# Altium PCB 主板-霍尔BC接地.PcbDoc (part 3 of 6)
Units mm, origin at the board's own origin, x right, y up, seen from the top; angles counter-clockwise.
Board outline 97.69 x 103.45 mm, 2 copper layers (Top Layer, Bottom Layer); 83 components, 83 nets, 266 pads, 295 vias.
Unrouted connection lines stored in the file: 11.
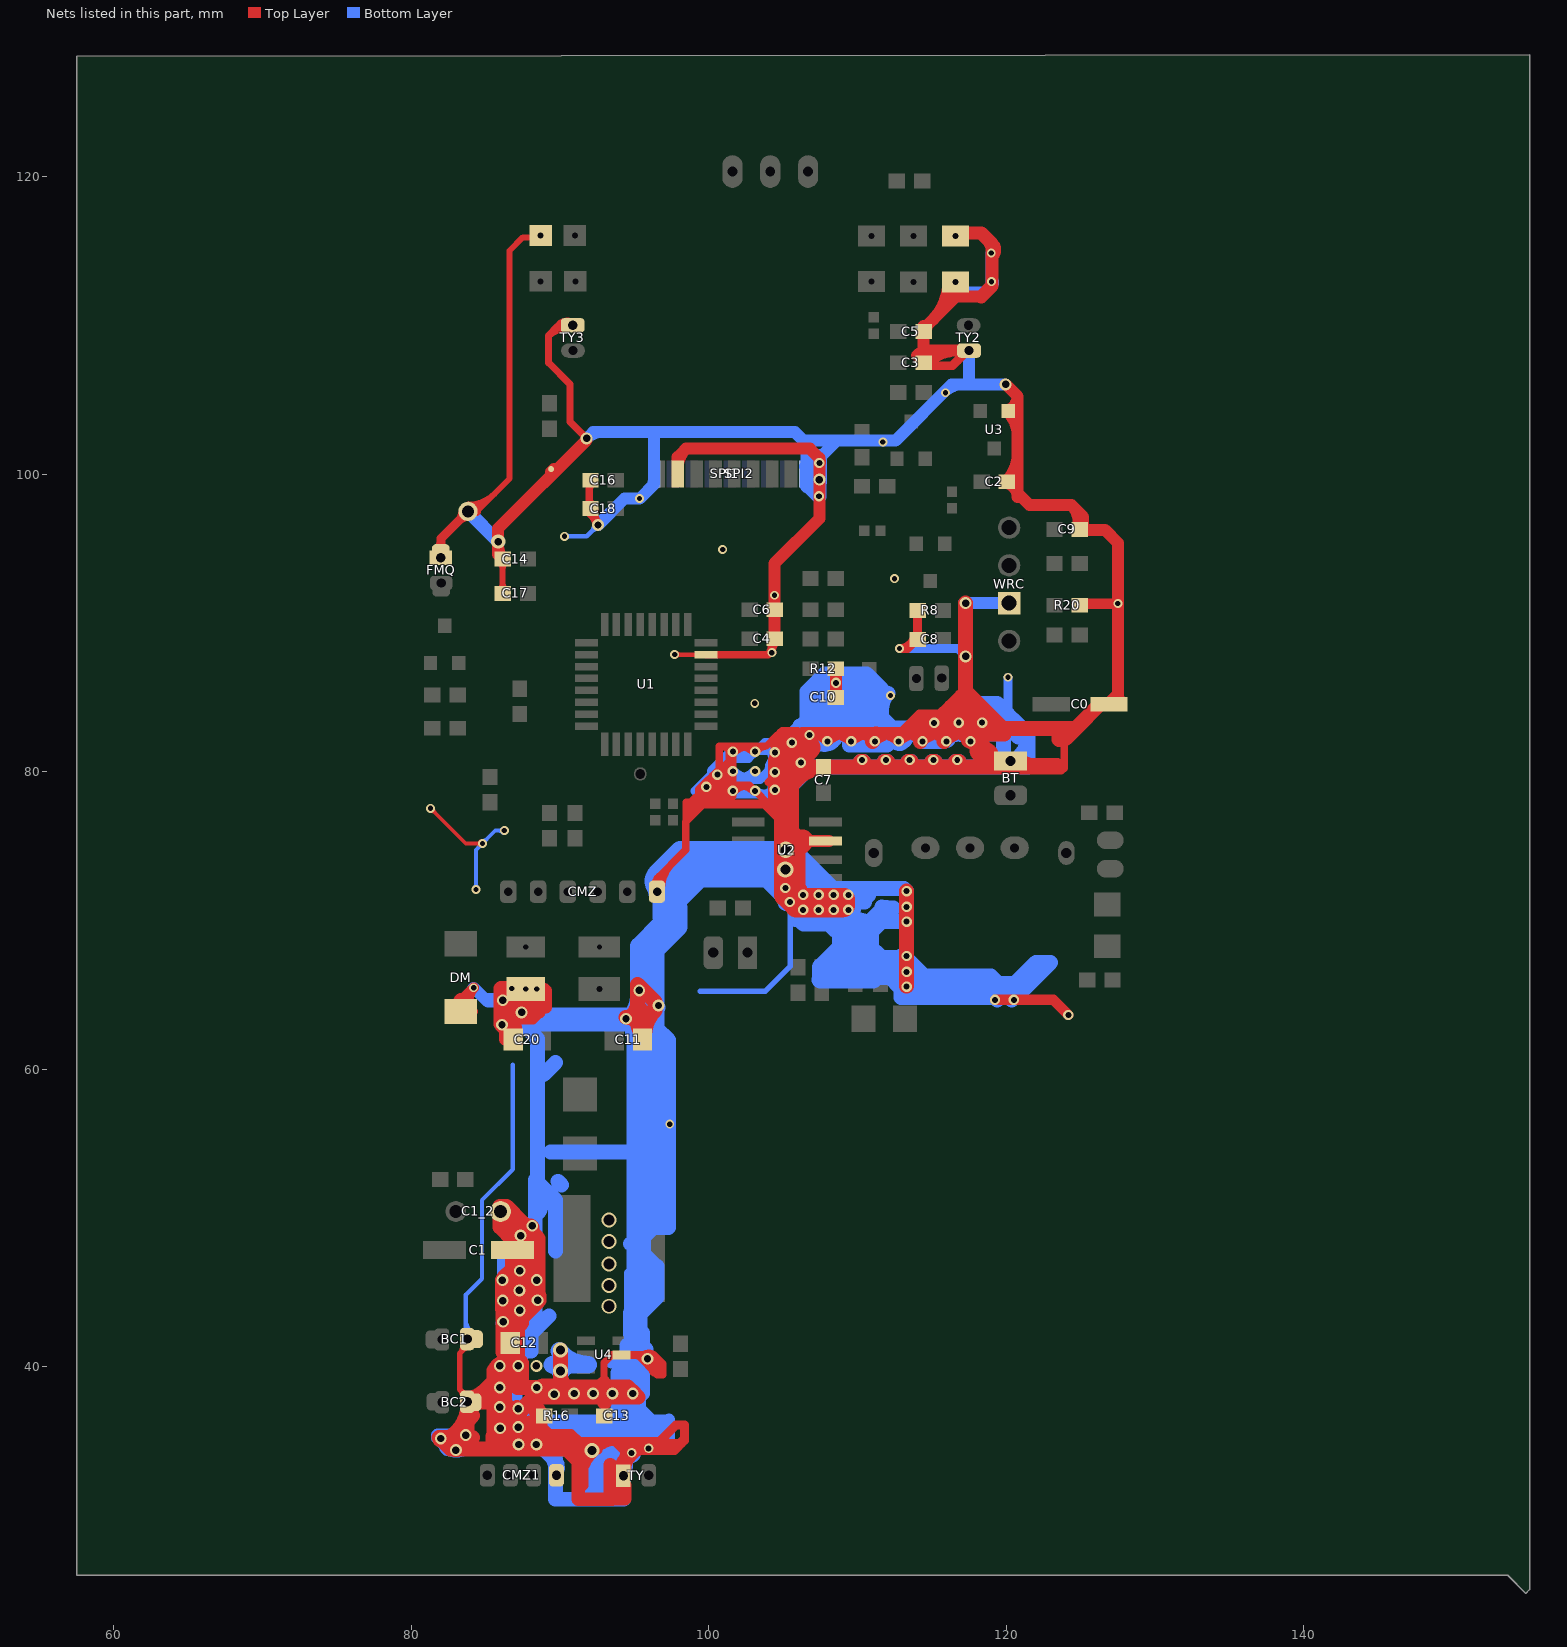
[diagram p3: the nets of this part, all layers, seen from the top]

## Via types
v1: diameter 0.6, hole 0.35, Top Layer to Bottom Layer, 117 vias
v2: diameter 0.7, hole 0.4, Top Layer to Bottom Layer, 104 vias
v3: diameter 0.8, hole 0.5, Top Layer to Bottom Layer, tented both sides, 32 vias
v4: diameter 0.8, hole 0.5, Top Layer to Bottom Layer, 15 vias
v5: diameter 1, hole 0.6, Top Layer to Bottom Layer, tented both sides, 5 vias
v6: diameter 1, hole 0.75, Top Layer to Bottom Layer, tented both sides, 5 vias
v7: diameter 3.4, hole 2.9, Top Layer to Bottom Layer, 4 vias
v8: diameter 0.65, hole 0.4, Top Layer to Bottom Layer, tented both sides, 2 vias
v9: diameter 0.8, hole 0.35, Top Layer to Bottom Layer, 2 vias
v10: diameter 0.7, hole 0.35, Top Layer to Bottom Layer, 2 vias
v11: diameter 1.1, hole 0.68, Top Layer to Bottom Layer, 2 vias
v12: diameter 0.62, hole 0.4, Top Layer to Bottom Layer, 1 vias
v13: diameter 0.95, hole 0.5, Top Layer to Bottom Layer, 1 vias
v14: diameter 0.9, hole 0.5, Top Layer to Bottom Layer, tented both sides, 1 vias
v15: diameter 0.7, hole 0.4, Top Layer to Bottom Layer, tented bottom, 1 vias
v16: diameter 0.8, hole 0.5, Top Layer to Bottom Layer, tented bottom, 1 vias

## Nets (pads, with @x,y where several pads share a name; then routed paths per layer and width w, separated by ;. In a path a pad name is that pad's centre, name@x,y a point inside that pad or via, vN(x,y) a via of type N, cw(c..) or ccw(c..) an arc to the next point about the centre after c; other vN are vias at no path point) (continued)
GND: BC1.1 BC2.1 BT.2 C0.2 C1.1 C1_2.1 C2.1 C3.1 C4.2 C5.1 C6.1 C7.1 C8.1 C9.1 C10.2 C11.2 C12.2 C13.2 C14.2 C16.1 C17.2 C18.1 C20.1 CMZ1.7 CMZ.2 DM.1 FMQ.1 pad.0@81.991,94.717 pad.0@84.125,37.617 pad.0@84.226,41.859 pad.0@87.7,65.4 pad.0@88.7,116.053 pad.0@89.408,100.355 pad.0@96.33,100.032 pad.0@116.6,112.932 pad.0@116.6,116.032 pad.4@83.82,97.511 R8.2 R12.1 R16.2 R20.1 SPI1.7 SPI2.8 TY2.2 TY3.2 TY.2 U1.7 U2.3 U3.1 U4.2 WRC.2 | length 2552.9
  Top Layer w0.254: v1@81.305,77.373 cw(c81.305,76.956) 81.601,77.251 cw(c81.896,77.546) v1@81.478,77.546 ; v1(81.305,77.546) 83.668,75.184 v1(84.785,75.184) ; v3@83.52,35.639 ccw(c82.842,36.728) 84.125,36.728 ; v3@83.654,35.424 ccw(c83.127,36.271) 84.125,36.271 ; BC2.1@83.752,37.02 cw(c83.739,36.634) 84.125,36.634 ; pad.0@83.761,37.274 cw(c83.748,36.897) 84.125,36.897 ; v3@83.788,35.208 ccw(c83.411,35.814) 84.125,35.814 ; pad.0@83.861,37.225 cw(c83.526,36.728) 84.125,36.728 ; 84.125,35.255 84.125,36.728 ; pad.0@84.125,37.617 84.125,36.728 ; pad.0@84.389,37.225 ccw(c84.724,36.728) 84.125,36.728 ; v1@84.663,75.062 ccw(c84.368,74.766) 84.368,75.184 ccw(c84.368,75.602) v1@84.663,75.306 ; 85.573,37.617 85.877,37.617 86.276,37.617 86.766,37.617 ; v3@85.972,37.282 cw(c86.424,37.145) 86.424,37.617 ; v3@86.215,37.208 cw(c86.766,37.041) 86.766,37.617 ; v3@86.926,37.201 ccw(c86.38,37.231) 86.766,37.617 ; v3@87.183,37.458 cw(c87.153,38.004) 86.766,37.617 ; v3(87.198,37.186) 86.766,37.617 ; C0.2@126.695,84.557 126.84,84.549 C0.2@126.913,84.546
  Top Layer w0.3: C13.2@92.732,36.948 ccw(c92.112,37.568) 92.989,37.568 ; C13.2@92.989,36.8 92.989,37.854 ; 92.989,37.522 ccw(c93.802,37.522) C13.2@93.227,36.948 ; v1(97.714,87.884) U1.7@99.818,87.884 ; v1@97.82,87.778 cw(c98.076,87.522) 98.076,87.884 cw(c98.076,88.246) v1@97.82,87.99 ; 99.043,87.884 cw(c99.043,87.62) U1.7@99.229,87.807
  Top Layer w0.36: 83.363,38.379 ccw(c83.764,38.779) BC2.1@83.764,38.213 ; BC2.1@83.465,37.934 ccw(c82.765,37.985) 83.261,38.481 ; BC1.1@83.468,41.54 cw(c82.737,41.418) 83.261,40.894 ; pad.0@83.705,37.617 ccw(c82.691,37.617) 83.408,38.334 ccw(c84.125,39.051) pad.0@84.125,38.037 ; pad.0@83.806,41.859 cw(c82.792,41.859) 83.509,41.142 cw(c84.226,40.425) pad.0@84.226,41.439 ; pad.0@84.125,37.617 83.261,38.481 ; pad.0@84.226,41.859 83.261,40.894 ; 83.261,38.481 83.261,40.894
  Top Layer w0.4: pad.4@83.82,97.561 ccw(c83.82,99.097) 84.906,98.011 ; pad.4@83.82,97.961 ccw(c83.82,100.462) 85.589,98.693 ; pad.4@84.406,97.511 86.604,99.708 86.604,115.034 87.507,115.937 pad.0@88.583,115.937 ; C17.2@85.938,92.212 ccw(c85.471,92.679) 86.131,92.679 ; C14.2@85.938,94.088 cw(c85.471,93.621) 86.131,93.621 ; C17.2@86.131,91.75 C14.2@86.131,94.319 ; 86.131,92.769 ccw(c86.919,92.769) C17.2@86.362,92.212 ; 86.131,93.531 cw(c86.919,93.531) C14.2@86.362,94.088
  Top Layer w0.495: U1.7@99.825,87.877 104.006,87.877 C4.2@104.523,88.724 ; 103.797,87.877 ccw(c103.797,88.46) v1@104.209,88.048 ; v1@104.066,87.975 ccw(c103.169,88.523) C4.2@104.162,88.868 ; v1@104.297,88.023 cw(c104.87,88.162) C4.2@104.367,88.468 ; C4.2@104.419,88.951 C4.2@104.65,88.951 ; C0.2@126.913,84.546 126.924,84.328 C0.2@126.924,84.633
  Top Layer w0.5: v5@89.88,39.54 cw(c89.236,38.794) 90.221,38.794 ; 89.987,110.08 cw(c90.496,109.572) TY3.2@90.559,110.288 ; v5@89.989,39.485 cw(c89.926,39.197) 90.221,39.197 ; 90.221,38.811 90.221,39.227 90.51,38.938 cw(c91.086,39.514) v5@90.288,39.679 ; TY3.2@90.36,110.167 cw(c89.826,110.616) 89.826,109.919 ; TY3.2@90.515,109.79 ccw(c90.373,108.181) 89.23,109.323 ; TY3.2@90.855,109.919 89.826,109.919 ; v4(91.796,102.413) 90.678,103.53 90.678,106.07 89.23,107.518 89.23,109.323 ; C18.1@91.823,97.877 ccw(c91.461,98.239) 91.973,98.239 ; C16.1@91.823,99.423 cw(c91.461,99.061) 91.973,99.061 ; 91.973,98.368 ccw(c92.668,98.368) C18.1@92.177,97.877 ; 91.973,98.932 cw(c92.668,98.932) C16.1@92.177,99.423 ; v4@91.992,38.412 92.005,38.424 92.227,38.647 92.368,38.647 ; C16.1@92.05,99.6 91.973,99.523 91.973,97.379 v4@92.558,96.795 ; 92.161,97.191 cw(c91.566,96.596) v4@92.408,96.596 ; C18.1@92.34,97.631 ccw(c93.161,97.398) v4@92.558,96.795 ; 92.366,97.127 cw(c91.85,96.83) v4@92.415,96.643 ; v4@92.377,38.202 cw(c93.475,38.202) 92.699,38.978 ; v4(92.558,96.596) v4@92.558,96.795 ; 92.95,38.643 92.964,38.643 92.964,38.648 92.964,38.65 92.964,39.243 ; v4@93.173,38.203 cw(c93.621,38.201) 93.621,38.649 ; v4@93.373,38.207 ccw(c91.975,38.254) 92.964,39.243 ; v4@93.428,37.954 93.675,38.202 94.123,38.649 ; v4@93.523,38.352 ccw(c93.523,39.082) 94.039,38.565 ; 93.523,38.649 94.123,38.649 ; 93.523,38.65 93.523,38.684 92.964,39.243 ; v4@93.673,38.201 cw(c94.123,38.199) 94.123,38.649 ; U4.2@94.539,40.767 95.25,40.767 ; 94.882,40.804 cw(c94.882,39.535) v16@95.779,40.432 ; v16@95.752,40.862 cw(c95.969,40.336) 96.371,40.738 ; v16@95.819,40.673 cw(c95.6,41.117) 95.25,40.767 ; v16@95.942,40.4 cw(c96.278,39.585) 96.901,40.208 ; v16@96.035,40.537 cw(c96.305,40.534) 96.305,40.804 ; v16@96.035,40.538 ccw(c97.378,40.538) 96.428,39.589 ; CMZ.2@96.326,72.364 ccw(c95.897,72.829) 96.53,72.829 ; CMZ.2@96.33,72.144 cw(c97.502,72.144) 96.673,72.972 ; CMZ.2@96.53,71.944 96.53,72.829 ; CMZ.2@96.733,72.364 cw(c97.163,72.829) 96.53,72.829 ; CMZ.2@96.83,72.144 cw(c99.209,72.144) 97.527,73.826 ; 99.113,78.285 99.125,78.272 99.162,78.236 99.456,77.942 99.496,77.902 ; 99.136,78.308 98.476,77.648 ; 99.339,78.181 cw(c100.087,78.181) v2@99.876,78.898 ; 99.459,78.897 ccw(c99.563,78.923) v2@99.563,78.816 ; 99.587,78.606 ccw(c99.199,78.994) v2@99.747,78.994 ; 99.67,78.323 cw(c100.518,78.323) v2@99.918,78.923 ; v2@99.763,79.048 cw(c99.339,79.32) 99.339,78.816 ; v2@99.808,78.902 ccw(c99.64,78.512) 99.339,78.812 ; v2@99.816,78.899 ccw(c99.708,78.574) 99.466,78.816 101.397,80.747 ; v2@99.847,79.094 ccw(c99.847,79.642) 100.235,79.255 ; v2@99.854,79.33 cw(c99.953,79.231) 100.01,79.359 ; v2@99.883,79.087 ccw(c100.135,79.748) 100.635,79.248 ; v2@99.919,79.064 ccw(c100.508,79.64) 100.508,78.816 ; v2@99.92,79.063 ccw(c100.965,80.052) 100.965,78.613 ; v2@99.948,79.202 cw(c100.892,78.657) v2@100.61,79.71 ; 99.949,78.435 99.822,78.308 ; 99.98,79.456 cw(c100.584,78.852) 100.584,79.707 ccw(c100.584,79.159) 100.196,79.546 ; 100.162,79.512 ccw(c100.679,78.994) 99.947,78.994 cw(c100.986,78.994) v2@100.252,79.728 ; 100.27,79.289 ccw(c99.752,79.807) 100.484,79.807 cw(c100.059,79.807) 100.359,79.506 ; 100.389,79.413 ccw(c100.181,79.666) v2@100.49,79.774 ; 100.407,78.308 ccw(c100.407,79.937) v2@101.558,78.785 ; 100.416,79.436 cw(c101.629,78.223) 101.629,79.938 ccw(c101.629,79.204) 101.11,79.723 ; v2@100.486,79.785 cw(c99.46,79.559) 100.203,78.816 ; v2@100.513,79.878 ccw(c100.036,80.355) 100.711,80.355 ; v2@100.551,79.712 cw(c100.277,78.918) 101.117,78.918 ; v2(100.584,79.807) 100.711,79.934 100.711,81.737 ; v2@100.631,79.895 ccw(c101.032,80.649) 101.282,79.832 ; v2@100.64,79.89 ccw(c100.951,80.355) v2@101.346,79.959 ; v2@100.674,79.85 cw(c100.962,79.988) 100.736,80.213 ; v2@100.682,79.788 cw(c101.194,79.693) 101.194,80.213 ; v2@100.684,79.807 cw(c101.232,79.807) 100.845,80.194 ; 100.885,80.031 cw(c100.584,80.332) 100.584,79.907 ccw(c100.584,80.639) 101.102,80.121 ; 100.965,80.213 cw(c100.965,79.374) v2@101.558,79.967 ; 101.117,78.966 cw(c102.263,78.966) v2@101.68,79.952 ; 101.346,79.113 cw(c102.554,79.113) v2@101.7,79.967 ; 101.346,79.64 ccw(c102.554,79.64) v2@101.7,78.785 ; 101.397,80.704 cw(c102.103,80.704) v2@101.688,81.275 ; v2@101.397,81.356 101.397,80.747 ; v2@101.529,78.708 ccw(c101.117,78.683) 101.117,79.096 ; v2@101.534,81.325 cw(c100.996,81.147) 101.397,80.747 ; v2@101.536,78.75 cw(c101.117,78.908) 101.117,78.461 ; v2@101.539,79.995 ccw(c101.194,79.831) 101.194,80.213 ; v2@101.547,81.299 ccw(c100.711,80.72) 100.711,81.737 ; v2@101.565,78.638 ccw(c101.279,78.299) 100.965,78.613 ; v2@101.693,80.115 cw(c102.218,80.747) 101.397,80.747 ; v2@101.7,81.285 cw(c102.79,80.195) 102.79,81.737 ; v2@101.702,78.646 cw(c102.743,77.666) 102.743,79.096 ; 101.963,79.096 cw(c101.963,77.553) v2@103.053,78.644 ; 101.963,81.737 cw(c101.963,80.195) v2@103.053,81.285 ; v2@103.214,81.313 cw(c103.886,80.993) 103.886,81.737 ; 104.013,79.299 104.242,79.527 ; 104.094,79.38 ccw(c103.49,79.985) v2@104.345,79.985 ; 104.242,78.059 cw(c105.177,78.059) v2@104.516,78.72 ; 104.242,79.253 cw(c105.177,79.253) 104.516,79.914 ccw(c104.817,79.613) 104.391,79.613 ; 104.242,79.523 ccw(c105.177,79.523) v2@104.516,78.862 ; 104.242,80.572 cw(c105.178,80.572) v2@104.516,81.235 ; 104.242,80.717 ccw(c105.177,80.717) v2@104.516,80.055 ; 104.242,80.734 cw(c104.83,80.734) v2@104.501,81.222 ; v2@104.349,79.956 cw(c103.938,79.831) 104.242,79.527 ; v2@104.351,81.271 cw(c103.906,81.107) 104.242,80.772 ; 104.369,80.366 104.391,80.366 ; v2@104.531,80.036 cw(c104.763,80.174) 104.572,80.366 ; v2@104.545,79.985 cw(c105.399,79.985) 104.795,80.589 ; v2@104.545,81.305 cw(c105.707,81.305) 104.886,82.127 ; 104.572,82.423 104.496,82.347 ; 104.648,72.147 cw(c105.772,72.147) v11@105.286,73.161 ; 104.648,72.252 104.648,76.86 104.47,77.038 ; 104.648,72.74 cw(c107.193,72.74) v11@105.394,74.54 ; 104.648,72.942 cw(c105.391,72.942) v11@105.069,73.612 ; 104.648,73.655 ccw(c106.624,73.655) v2@105.227,72.258 ; 104.648,73.947 cw(c105.986,73.947) v11@105.04,74.894 ; 104.648,74.175 ccw(c105.9,74.175) v11@105.015,73.29 ; 104.648,75.382 ccw(c107.107,75.382) v11@105.368,73.644 ; 104.648,75.557 ccw(c105.986,75.557) v11@105.04,74.611 ; 104.648,76.764 ccw(c107.193,76.764) v11@105.394,74.964 ; 104.662,75.279 ccw(c105.689,75.417) v11@105.06,74.593 ; v2@104.723,81.508 cw(c105.588,80.643) v2@105.588,81.866 ; 104.745,81.53 cw(c104.445,81.83) 104.445,81.405 ccw(c104.445,83.056) v2@105.613,81.889 ; 105.004,80.798 ccw(c103.836,81.966) 105.488,81.966 cw(c105.001,81.966) 105.345,81.622 ; 105.253,81.681 ccw(c104.998,82.124) v2@105.491,81.992 ; v11@105.255,73.839 cw(c105.721,74.11) v11@105.374,74.523 ; v2(105.588,81.966) 105.379,82.123 105.13,82.372 104.826,82.677 ; v2@105.588,82.066 ccw(c105.588,82.553) 105.932,82.208 ; v2@105.59,82.066 ccw(c105.622,83.633) v2@106.731,82.525 ; v2@105.614,81.89 cw(c106.782,80.722) 106.782,82.374 ccw(c106.782,81.887) 106.437,82.231 ; v2@105.688,81.972 cw(c106.739,82.034) 105.994,82.779 ; 106.393,82.329 cw(c106.632,81.915) v2@106.756,82.377 ; 106.418,82.525 cw(c106.418,82.11) v2@106.711,82.403 ; v2@106.685,82.447 ccw(c106.248,82.325) 106.248,82.779 112.981,82.779 ; v2@106.832,82.387 cw(c107.04,82.026) 107.148,82.429 ; v2@106.907,82.779 cw(c106.907,82.509) 107.167,82.581 ; 107.146,82.525 ccw(c107.146,82.11) v2@106.852,82.403 ; 107.176,82.537 ccw(c107.176,82.079) v2@106.852,82.403 ; 107.759,82.779 ccw(c107.759,81.497) v2@106.852,82.403 ; v2@107.897,81.98 ccw(c106.744,81.066) v2@106.744,82.537 ; v2@107.898,81.978 ccw(c106.731,81.004) v2@106.731,82.525 ; 108.138,82.537 cw(c108.138,80.605) 109.504,81.971 ccw(c108.169,80.635) 108.169,82.525 ; 109.382,82.525 ccw(c109.382,80.635) 108.046,81.971 cw(c109.412,80.605) 109.412,82.537 ; 109.738,82.537 cw(c109.738,80.605) 111.104,81.971 ccw(c109.769,80.635) 109.769,82.525 ; 110.982,82.525 ccw(c110.982,80.635) 109.646,81.971 cw(c111.012,80.605) 111.012,82.537 ; 111.338,82.537 cw(c111.338,80.605) 112.704,81.971 ccw(c111.369,80.635) 111.369,82.525 ; 112.582,82.525 ccw(c112.582,80.635) 111.246,81.971 cw(c112.612,80.605) 112.612,82.537 ; v2@112.865,82.086 cw(c113.409,82.351) 112.981,82.779 ; 112.938,82.537 cw(c112.938,80.605) 114.304,81.971 ccw(c112.969,80.635) 112.969,82.525 ; 114.182,82.525 ccw(c114.182,80.635) 112.846,81.971 cw(c114.212,80.605) 114.212,82.537 ; 114.569,82.525 cw(c114.569,80.635) v2@115.904,81.971 ; v2@115.064,83.286 ccw(c114.63,83.285) 114.63,83.718 ; v2@115.15,83.187 ccw(c114.962,81.762) 113.944,82.779 ; v2@115.25,83.337 ccw(c116.218,83.896) 116.218,82.779 ; 115.782,82.525 ccw(c115.782,80.635) 114.446,81.971 cw(c115.812,80.605) 115.812,82.537 ; v2@115.903,81.973 ccw(c114.592,80.733) 114.592,82.537 ; v2@115.916,82.123 ccw(c115.485,82.715) 116.218,82.715 ; v2@115.94,82.136 ccw(c115.788,82.537) 116.218,82.537 ; v2@116.073,82.061 cw(c116.591,82.164) 116.218,82.537 ; v2@116.073,82.064 cw(c116.555,82.175) 116.205,82.525 ; 116.459,82.779 117.831,82.779 cw(c117.831,83.81) v2@116.904,83.356 ; 117.382,82.525 ccw(c117.382,80.635) 116.046,81.971 cw(c117.412,80.605) 117.412,82.537 ; v2@117.529,81.973 ccw(c116.218,80.73) 116.218,82.537 ; v2@117.531,81.972 ccw(c116.205,80.659) 116.205,82.525 ; 118.059,82.525 116.205,82.525 ; 118.059,82.537 116.218,82.537 ; BT.2@120.323,80.3 ccw(c120.9,80.877) 120.9,80.061 ; 120.498,80.061 123.723,80.061 123.901,80.239 123.901,81.813 123.546,82.169 ; BT.2@121.03,80.441 cw(c121.606,79.865) 121.606,80.68 ; 121.493,80.315 cw(c121.493,81.47) 120.676,80.653 ccw(c122.107,82.084) 122.107,80.061 ; 121.819,80.68 cw(c121.819,81.796) BT.2@121.03,81.007 ; 122.701,80.315 cw(c122.701,82.678) BT.2@121.03,81.007 ; 123.314,80.061 cw(c123.314,83.291) BT.2@121.03,81.007 ; 124.003,82.245 124.003,82.525 124.003,82.753 124.117,82.639 ; 124.231,82.525 124.117,82.639 ; 125.499,84.021 cw(c126.163,83.357) C0.2@126.163,84.296 ; C0.2@126.924,84.633 C0.2@126.913,84.622 ; 89.23,109.323 89.826,109.919 ; v4@92.346,38.293 cw(c92.558,38.458) 92.368,38.647 ; v4@92.346,38.294 cw(c92.557,38.458) 92.368,38.647 ; v4@92.346,38.293 cw(c92.558,38.458) 92.368,38.647 ; 92.368,38.647 92.371,38.65 ; 92.371,38.65 ccw(c92.563,38.457) 92.347,38.292 cw(c92.563,38.457) 92.371,38.65 ; 92.371,38.65 92.964,39.243 ; 92.964,39.243 92.964,40.272 93.496,40.804 96.305,40.804 ; 95.25,40.767 96.545,39.472 96.901,39.472 96.901,40.208 ; 96.305,40.804 96.901,40.208 ; 96.53,72.829 98.462,74.762 98.462,76.641 98.476,76.655 ; 98.476,76.655 99.609,77.788 ; 98.476,76.655 98.476,77.241 ; 98.476,77.241 99.023,77.788 99.609,77.788 ; 98.476,77.241 98.476,77.622 ; 98.476,77.622 98.802,77.949 98.929,77.949 ; 98.476,77.622 98.476,77.648 ; 98.476,77.648 98.476,77.949 98.929,77.949 ; 98.929,77.949 99.339,78.359 ; 98.929,77.949 101.194,80.213 ; 99.339,78.359 99.339,78.486 v2@99.67,78.816 ; 99.339,78.359 99.339,78.812 ; 99.339,78.812 99.343,78.816 cw(c99.638,78.521) 99.807,78.903 ccw(c99.636,78.52) 99.339,78.816 ; 99.339,78.816 100.736,80.213 ; 99.339,78.816 v2@99.67,78.816 ; 99.496,77.902 99.609,77.788 ; 99.496,77.902 99.416,77.902 99.822,78.308 ; 99.496,77.902 103.607,77.902 103.72,77.788 ; 99.609,77.788 103.72,77.788 ; v2@99.67,78.816 v2(99.847,78.994) 100.892,80.038 101.117,79.812 101.117,79.731 ; v2@99.67,78.816 99.67,78.308 99.822,78.308 ; v2@99.67,78.816 100.203,78.816 ; 99.822,78.308 101.575,78.308 101.629,78.363 v2(101.629,78.715) 101.629,79.096 ; 100.203,78.816 cw(c100.203,79.083) 99.944,79.018 ccw(c100.203,79.083) 100.203,78.816 ; 100.203,78.816 100.635,79.248 ; 100.203,78.816 100.508,78.816 ; 100.203,78.816 100,78.613 100.965,78.613 ; 100.508,78.816 100.635,78.943 ; 100.635,78.943 100.787,79.096 101.117,79.096 ; 100.635,78.943 100.965,78.613 ; 100.635,78.943 100.635,79.248 ; 100.635,79.248 101.117,79.731 ; 100.711,81.737 103.886,81.737 ; 100.736,80.213 101.194,80.213 ; 100.965,78.613 101.117,78.461 ; 100.965,78.613 101.117,78.765 101.117,79.096 ; 101.117,78.461 101.346,78.461 101.346,79.096 ; 101.117,79.096 101.117,79.731 ; 101.117,79.096 101.346,79.096 ; 101.117,79.731 cw(c101.619,79.229) 101.628,79.938 ccw(c101.619,79.229) 101.117,79.731 ; 101.117,79.731 v2@101.346,79.959 ; 101.346,79.096 v2@101.346,79.959 ; 101.346,79.096 101.629,79.096 ; v2@101.346,79.959 101.397,80.01 101.397,80.747 ; 101.397,80.747 101.629,80.979 v2(101.629,80.038) 101.629,79.096 ; 101.629,79.096 102.743,79.096 ; 102.743,79.096 v2(103.124,78.715) 104.05,77.788 ; 103.72,77.788 104.242,77.267 ; 103.72,77.788 104.05,77.788 ; 103.886,81.737 104.47,82.321 ; 104.05,77.788 104.242,77.597 ; 104.05,77.788 104.204,77.788 104.242,77.826 ; 104.242,77.267 104.242,77.597 ; 104.242,77.267 104.47,77.038 ; 104.242,77.597 104.242,77.826 ; 104.242,77.826 104.242,79.527 ; 104.242,79.527 104.242,80.518 ; 104.242,79.527 104.391,79.527 104.391,80.366 ; 104.242,80.518 ccw(c104.762,80.518) 104.496,80.071 cw(c104.762,80.518) 104.242,80.518 ; 104.242,80.518 104.242,80.772 ; 104.242,80.518 104.391,80.667 ; 104.242,80.772 104.391,80.921 ; 104.391,80.356 ccw(c104.817,80.356) v2@104.516,80.055 ; 104.391,80.356 ccw(c104.817,80.356) v2@104.516,80.055 ; 104.391,80.356 ccw(c104.817,80.356) v2@104.516,80.055 ; 104.391,80.366 104.47,80.366 ; 104.391,80.366 104.391,80.667 ; 104.391,80.667 104.47,80.747 ; 104.391,80.667 104.391,80.921 ; 104.391,80.921 104.391,81.632 104.47,81.712 ; 104.391,80.921 v2@104.47,81.001 ; 104.391,80.933 cw(c104.818,80.933) v2@104.516,81.235 ; 104.391,80.933 cw(c104.818,80.933) v2@104.516,81.235 ; 104.391,80.933 cw(c104.818,80.933) v2@104.516,81.235 ; 104.47,77.038 104.47,80.366 ; 104.47,80.366 104.572,80.366 ; 104.47,80.366 104.47,80.747 ; 104.47,80.747 106.248,82.525 v2@106.731,82.525 ; 104.47,80.747 v2@104.47,81.001 ; v2@104.47,81.001 104.47,81.712 ; v2@104.47,81.001 104.496,81.026 104.496,81.28 105.994,82.779 ; 104.47,81.712 105.537,82.779 ; 104.47,81.712 104.47,82.321 ; 104.47,82.321 104.496,82.347 ; 104.496,82.347 104.826,82.677 ; 104.572,80.366 v2@106.731,82.525 ; 104.826,82.677 104.928,82.779 105.537,82.779 ; 105.537,82.779 105.994,82.779 ; v2@106.731,82.525 111.239,82.525 112.727,82.525 ; v2@106.731,82.525 v2@106.743,82.537 ; v2@106.743,82.537 111.252,82.537 112.74,82.537 ; 112.727,82.525 116.027,82.525 116.205,82.525 ; 112.727,82.525 112.74,82.537 ; 112.74,82.537 114.592,82.537 ; 112.74,82.537 112.981,82.779 ; 112.981,82.779 114.15,83.947 115.875,83.947 116.279,84.351 116.838,84.351 116.894,84.351 116.261,83.718 116.205,83.718 115.646,83.718 114.884,83.718 ; 112.981,82.779 113.538,82.779 ; 113.538,82.779 113.944,82.779 ; 113.538,82.779 114.198,83.439 ; 113.944,82.779 114.884,83.718 ; 113.944,82.779 114.706,82.779 114.833,82.779 115.265,82.779 116.218,82.779 ; 114.198,83.439 114.478,83.718 ; 114.198,83.439 113.919,83.439 114.198,83.718 114.478,83.718 ; 114.198,83.439 114.351,83.439 114.63,83.718 ; 114.478,83.718 114.63,83.871 114.783,83.871 114.63,83.718 ; 114.478,83.718 114.63,83.718 ; 114.592,82.537 116.04,82.537 116.218,82.537 ; 114.63,83.718 114.884,83.718 ; 116.205,82.525 116.218,82.537 ; 116.218,82.537 116.218,82.715 ; 116.218,82.715 116.218,82.779 ; 123.685,80.48 123.485,80.68 120.853,80.68 121.218,80.315 123.52,80.315 123.685,80.48 ; 123.685,80.48 123.698,80.467 123.698,80.493 123.685,80.48 ; 124.117,82.639 124.384,82.906 126.024,84.546 126.303,84.546 C0.2@126.837,84.546 ; C0.2@126.837,84.546 126.84,84.549 C0.2@126.913,84.622 ; C0.2@126.837,84.546 C0.2@126.913,84.546 C0.2@126.913,84.622 ; v2@100.513,79.736 cw(c100.22,79.443) 100.635,79.443 ccw(c100.22,79.443) v2@100.513,79.736 ; 104.242,79.484 cw(c104.706,79.484) 104.491,79.896 ccw(c104.706,79.484) 104.242,79.484
  Top Layer w0.6: pad.0@81.779,94.929 ccw(c81.267,95.441) 81.991,95.441 ccw(c82.716,95.441) pad.0@82.203,94.929 ; FMQ.1@81.991,94.398 81.991,95.682 pad.4@83.82,97.511 pad.4@84.406,97.511 ; pad.4@83.47,97.511 cw(c82.625,97.511) 83.223,96.913 cw(c83.82,96.316) pad.4@83.82,97.161 ; v3@85.883,37.216 cw(c85.417,36.751) 86.076,36.751 ; v3@85.908,35.936 ccw(c85.504,36.34) 86.076,36.34 ; v3@86.076,36.198 86.076,37.036 86.081,37.032 86.276,36.836 86.689,36.423 ; 86.69,36.423 87.148,36.423 87.546,36.423 87.774,36.195 88.438,35.53 ; 86.936,34.468 87.224,34.468 87.427,34.671 87.741,34.671 89.103,34.671 ; v3@86.982,36.055 v3@87.516,36.055 ; v3@87.153,35.852 cw(c86.869,35.299) 87.49,35.299 ; v3@87.169,34.857 ccw(c86.789,35.446) 87.49,35.446 ; v3@87.178,34.862 ccw(c86.921,35.369) 87.49,35.369 ; v3@87.226,35.845 cw(c87.564,34.656) 88.438,35.53 ; v3@87.258,35.861 cw(c87.481,35.564) 87.744,35.827 ; v3@87.296,35.962 ccw(c88.033,36.124) 88.033,35.369 ; v3@87.322,34.758 cw(c88.033,34.651) 88.033,35.369 ; v3@87.376,36.195 v3@87.516,36.055 ; 87.813,35.123 ccw(c88.417,35.727) v3@88.417,34.873 ; v3@88.463,34.684 cw(c88.756,34.121) 89.205,34.569 ; v3@88.482,34.696 cw(c88.779,34.347) 89.103,34.671 ; v3@88.482,34.849 cw(c89.163,35.642) 88.117,35.642 ; pad.0@88.583,115.937 pad.0@88.7,116.053 ; 88.67,35.811 cw(c89.605,35.811) R16.2@89.024,36.543 ; R16.2@88.67,36.957 88.67,36.195 88.67,35.841 88.981,35.53 ; 88.951,35.865 89.285,35.53 ; 89.852,35.052 90.037,34.868 ; 91.237,31.623 91.618,32.004 91.618,33.223 91.288,33.553 ; v5@91.821,34.592 cw(c92.558,34.088) 92.558,34.98 ; 91.924,34.98 cw(c91.924,34.353) v5@92.551,34.39 ; v5@91.952,34.354 ccw(c91.288,34.315) 91.288,34.98 ; v5@92.316,34.253 cw(c93.696,33.308) 93.696,34.98 ; 94.168,34.508 ccw(c94.818,35.158) v8@94.818,34.239 ; 94.786,34.98 cw(c94.786,33.343) v8@95.944,34.501 ; v8@94.814,34.238 cw(c94.711,34.868) 94.259,34.417 93.696,34.98 ; v8(95.961,34.519) 96.114,34.366 97.688,34.366 98.374,35.052 98.374,36.093 97.815,36.093 96.787,35.065 97.003,34.849 ; v8@95.979,34.501 cw(c97.134,33.349) 97.134,34.98 93.696,34.98 ; v8@95.979,34.536 ccw(c96.389,34.947) 96.389,34.366 ; 96.698,34.544 96.749,34.595 97.003,34.849 ; 96.723,34.849 97.003,34.849 ; 98.171,34.849 98.171,34.976 ; 98.374,35.179 98.171,34.976 ; C8.1@113.781,88.686 cw(c112.827,89.639) v1(112.827,88.29) ; C8.1@113.813,88.971 cw(c112.827,89.345) v1(112.827,88.29) ; R8.2@114.05,90.881 114.05,88.955 113.386,88.29 v1(112.827,88.29) ; C3.1@114.45,107.3 116.382,107.3 117.413,108.331 TY2.2@117.501,108.419 ; C3.1@114.641,107.641 ccw(c115.466,108.466) 115.466,107.3 ; 116.718,107.636 ccw(c116.036,108.319) TY2.2@117.001,108.319 ; v3@86.054,37.287 ccw(c86.605,37.287) 86.215,36.897 ; v3@86.054,37.287 ccw(c86.606,37.287) 86.215,36.897 ; v3@86.054,37.287 ccw(c86.606,37.287) 86.215,36.897 ; v3@87.269,36.012 ccw(c87.716,36.458) 87.716,35.827 ; v3@87.269,36.012 ccw(c87.716,36.458) 87.716,35.827 ; v3@87.269,36.012 ccw(c87.716,36.458) 87.716,35.827 ; v3@87.294,34.843 ccw(c87.71,35.259) 87.71,34.671 ; v3@87.294,34.843 ccw(c87.71,35.259) 87.71,34.671 ; v3@87.294,34.843 ccw(c87.71,35.259) 87.71,34.671 ; v3@87.298,35.941 ccw(c88.03,35.941) 87.513,35.423 ; v3@87.298,35.941 ccw(c88.03,35.941) 87.513,35.423 ; v3@87.298,35.941 ccw(c88.03,35.941) 87.513,35.423 ; 87.427,35.509 cw(c87.759,35.841) 87.297,35.923 ccw(c87.759,35.841) 87.427,35.509 ; 87.427,35.509 87.109,35.827 v3@87.49,35.827 ; 87.427,35.509 87.49,35.446 ; 87.49,35.369 87.566,35.369 ; 87.49,35.369 87.49,35.446 ; 87.49,35.446 cw(c87.955,35.911) 87.298,35.937 ccw(c87.955,35.911) 87.49,35.446 ; 87.49,35.446 87.49,35.573 v3@87.49,35.827 ; 87.49,35.446 87.566,35.369 ; v3@87.49,35.827 87.744,35.827 ; v3@87.516,36.055 87.744,35.827 ; 87.566,35.369 v3@88.117,34.819 ; 87.566,35.369 88.033,35.369 ; 87.744,35.827 87.933,35.827 88.117,35.642 ; 87.931,34.671 ccw(c87.931,35.259) v3@88.347,34.843 ; 87.931,34.671 ccw(c87.931,35.259) v3@88.347,34.843 ; 87.931,34.671 ccw(c87.931,35.259) v3@88.347,34.843 ; v3@88.117,34.819 89.15,34.819 ; v3@88.117,34.819 88.117,35.642 ; 88.438,35.53 89.15,34.819 ; 88.438,35.53 88.981,35.53 ; v3@88.488,34.843 ccw(c88.904,35.259) 88.904,34.671 ; v3@88.488,34.843 ccw(c88.904,35.259) 88.904,34.671 ; v3@88.488,34.843 ccw(c88.904,35.259) 88.904,34.671 ; 88.981,35.53 89.285,35.53 ; 88.981,35.53 89.764,34.747 ; 89.103,34.671 89.298,34.671 ; 89.103,34.671 89.205,34.569 ; 89.103,34.671 89.172,34.796 ; 89.15,34.819 89.184,34.819 89.172,34.796 ; 89.15,34.819 89.172,34.796 ; 89.172,34.796 89.298,34.671 ; 89.205,34.569 89.306,34.468 89.484,34.29 89.967,34.29 89.789,34.468 89.764,34.493 ; 89.285,35.53 89.764,35.052 89.764,34.747 ; 89.285,35.53 90.738,35.53 91.288,34.98 ; 89.298,34.671 89.586,34.671 89.687,34.569 89.764,34.493 ; 89.298,34.671 89.399,34.569 89.475,34.493 89.764,34.493 ; 89.764,34.493 89.764,34.595 89.764,34.671 89.764,34.747 ; 89.764,34.747 89.84,34.671 90.043,34.468 90.149,34.362 90.149,34.468 90.149,34.671 90.149,34.692 90.149,34.755 ; 90.037,34.868 90.149,34.755 ; 90.037,34.868 90.149,34.98 90.149,34.755 ; 90.149,34.755 90.424,34.48 90.424,34.722 90.165,34.98 91.288,34.98 ; 91.237,33.604 91.237,33.401 90.348,34.29 90.551,34.29 91.237,33.604 ; 91.237,33.604 91.288,33.553 ; 91.288,33.553 91.288,34.468 91.288,34.98 ; 91.288,34.98 93.696,34.98 ; 97.003,34.849 98.044,34.849 98.171,34.976 ; v3@87.162,35.848 cw(c86.973,35.366) 87.49,35.366 ccw(c86.973,35.366) v3@87.162,35.848 ; v3@87.18,35.843 cw(c87.112,35.471) 87.49,35.471 ccw(c87.112,35.471) v3@87.18,35.843 ; 88.67,36.145 cw(c89.043,36.145) 88.95,36.506 ccw(c89.043,36.145) 88.67,36.145
  Top Layer w0.7: DM.1@83.34,63.885 DM.1@84.125,63.885 ; DM.1@83.34,64.62 v1(84.201,65.481) ccw(c84.99,64.692) DM.1@84.023,64.135 ; DM.1@83.417,63.785 cw(c84.171,64.22) 83.555,64.836 ; v2(119.253,64.668) v2(120.523,64.668) 123.165,64.668 v2(124.181,63.652) ; R20.1@125.106,91.094 cw(c125.622,90.578) 125.622,91.308 ; R20.1@125.15,91.308 v1@127.432,91.308
  Top Layer w0.8: v13@85.847,95.152 ccw(c86.952,95.152) C14.2@86.171,94.371 ; C14.2@86.131,94.319 85.847,94.603 85.847,96.363 v4@91.796,102.311 ; C20.1@86.311,62 v3@86.311,62.763 ; C20.1@86.311,62.498 ccw(c85.612,62.498) v3(86.106,62.992) ; C20.1@86.681,62.277 ccw(c85.874,63.084) 87.015,63.084 ; 86.766,62.783 cw(c87.927,62.783) v3(87.427,63.83) ; 86.766,63.017 86.766,63.419 ; 86.766,63.052 cw(c87.555,63.052) v3(87.427,63.83) ; C20.1@86.958,62 86.766,62.191 86.958,62.383 87.015,62.44 87.015,63.419 ; 87.015,62.837 cw(c88.42,62.837) v3(87.427,63.83) ; 87.015,63.249 cw(c87.632,63.249) v3(87.427,63.83) ; pad.0@87.6,65.406 87.602,65.406 87.617,65.406 87.617,65.415 87.617,65.431 pad.0@87.617,65.457 ; 87.681,38.608 87.716,38.643 88.91,38.643 89.078,38.811 ; 88.064,64.371 ccw(c87.03,65.405) pad.0@88.493,65.405 ; 88.116,37.814 ccw(c87.744,38.432) v3(88.443,38.608) ; 88.316,37.854 92.989,37.854 ; pad.0@88.427,65.452 cw(c88.623,64.867) 89.06,65.303 ; v10(88.443,65.405) 88.958,65.405 89.06,65.303 ; pad.0@88.448,65.455 cw(c88.382,64.78) 89.06,64.78 ; pad.0@88.476,65.442 cw(c87.325,64.144) 89.06,64.144 ; pad.0@88.519,65.1 88.519,64.825 v3@87.524,63.83 ; 88.621,63.83 88.585,63.83 ; 88.895,37.854 ccw(c88.895,38.867) v3(89.611,38.151) ; 89.306,38.643 89.611,38.643 89.756,38.644 ; 89.408,100.155 ccw(c89.408,100.715) 89.804,100.319 ; 89.444,99.96 ccw(c89.048,100.355) 89.608,100.355 ; 89.857,38.744 ccw(c90.451,38.151) v3(89.611,38.151) ; 90.118,37.854 ccw(c90.118,39.041) v4(90.957,38.202) ccw(c91.797,39.041) 91.797,37.854 ; 90.263,37.854 cw(c90.263,40.428) v3(88.443,38.608) ; 90.328,37.854 cw(c90.328,38.867) v3(89.611,38.151) ; 90.957,38.659 90.957,38.649 90.957,38.647 90.957,38.645 89.764,38.644 89.756,38.644 ; 91.388,37.854 ccw(c91.388,39.041) v4(92.227,38.202) ; 92.227,38.647 92.368,38.647 92.533,38.648 92.674,38.648 92.964,38.648 92.989,38.648 93.076,38.648 93.522,38.649 ; 92.684,37.854 ccw(c92.684,39.041) v4(93.523,38.202) cw(c92.989,38.437) 92.989,37.854 ; v4(94.894,38.202) 94.894,38.32 94.894,38.329 95.269,37.954 95.261,37.954 ; 94.996,63.398 94.463,63.398 95.098,64.033 ; SPI1.7@97.917,100.032 97.917,101.16 98.484,101.727 106.807,101.727 107.442,101.092 v2(107.442,100.762) v4(107.442,99.644) 107.442,97.028 104.419,94.005 C4.2@104.419,88.951 ; SPI1.7@97.942,100.507 cw(c99.58,100.507) 98.422,101.665 ; v11@105.05,73.537 ccw(c104.403,74.185) 105.318,74.185 ; v11@105.075,74.646 cw(c104.489,74.06) 105.318,74.06 ; v2@105.156,71.862 ccw(c106.076,71.862) v2@105.425,71.212 ; 105.156,76.86 v11@105.156,73.575 ; v11@105.181,72.923 105.181,73.304 v11@105.156,73.33 ; v11@105.186,74.902 ccw(c105.238,76.473) 106.35,75.362 ; v11@105.273,73.525 cw(c105.746,73.902) v11@105.318,74.33 ; v11@105.305,73.451 cw(c106.857,73.655) 105.75,74.762 ; v2@105.435,71.204 cw(c105.744,71.704) 105.156,71.704 105.156,71.933 v2(105.156,72.187) v11@105.156,73.33 ; 105.588,76.124 106.35,75.362 ; 106.07,75.362 106.35,75.362 ; 107.294,101.24 cw(c106.816,100.762) v2@107.492,100.762 ; U2.3@108.077,75.362 106.35,75.362 ; C10.2@108.55,85 R12.1@108.55,86.932 ; C3.1@114.005,107.995 cw(c114.816,107.184) 114.816,108.331 117.413,108.331 TY2.2@117.475,108.331 ; C3.1@114.45,107.5 C5.1@114.45,109.976 ; C5.1@114.45,109.776 116.6,111.926 pad.0@116.6,112.932 ; C3.1@114.571,107.429 cw(c116.748,105.252) TY2.2@116.748,108.331 ; C5.1@114.6,109.6 cw(c115.388,109.6) 114.831,110.157 ; 115.036,110.362 ccw(c112.466,112.932) pad.0@116.1,112.932 ; pad.0@116.388,112.72 cw(c115.876,112.208) 116.6,112.208 cw(c117.324,112.208) pad.0@116.812,112.72 ; 116.401,111.728 ccw(c115.197,112.932) pad.0@116.9,112.932 ; 116.674,108.311 cw(c116.833,107.717) TY2.2@117.141,108.25 ; 116.756,111.946 118.321,111.946 ; v4(119.964,106.045) 120.766,105.243 ; C2.1@120.029,99.571 ccw(c118.25,101.35) 120.766,101.35 ; C2.1@120.073,99.404 cw(c119.817,98.489) 120.766,98.489 ; U3.1@120.115,104.19 cw(c118.541,102.616) 120.766,102.616 ; U3.1@120.132,104.322 ccw(c119.781,105.243) 120.766,105.243 ; C2.1@120.595,99.005 ccw(c120.181,99.419) 120.766,99.419 ; C9.1@124.804,96.327 ccw(c123.219,96.777) 124.384,97.942 ; C9.1@124.929,96.371 ccw(c124.314,96.986) 125.184,96.986 ; C0.2@126.924,84.633 127.533,85.242 127.533,95.377 126.644,96.266 125.184,96.266 125.184,97.142 124.384,97.942 ; v3(86.106,62.992) cw(c86.766,62.695) 86.766,63.419 ; v3(86.106,62.992) cw(c87.015,62.237) 87.015,63.419 ; 86.766,63.419 ccw(c86.766,64.155) v3(87.427,63.83) ; 86.766,63.419 87.015,63.419 ; 87.015,63.419 88.174,63.419 ; v3(87.427,63.83) ccw(c88.174,64.302) 88.174,63.419 ; v3(87.427,63.83) v3@87.524,63.83 ; v3@87.524,63.83 88.585,63.83 ; 88.174,63.419 88.585,63.83 ; 88.348,37.954 ccw(c87.957,38.345) v3(88.443,38.608) ; 88.348,37.954 cw(c89.114,37.188) v3(89.611,38.151) ; 88.348,37.954 89.037,38.644 ; v3(88.443,38.608) ccw(c89.364,39.378) 89.257,38.182 cw(c89.364,39.378) v3(88.443,38.608) ; v3(88.443,38.608) cw(c88.933,38.117) 88.933,38.811 ccw(c88.933,38.117) v3(88.443,38.608) ; v3(88.443,38.608) ccw(c88.72,38.961) 89.037,38.644 ; v3(88.443,38.608) ccw(c88.563,39.326) 89.078,38.811 ; 88.585,63.83 89.06,64.305 89.06,65.303 ; 89.037,38.644 cw(c89.037,38.063) v3(89.611,38.151) ; 89.037,38.644 89.756,38.644 ; 89.078,38.811 89.924,38.811 89.762,38.649 ; v3(89.611,38.151) cw(c90.802,36.963) 90.8,38.645 ccw(c90.802,36.963) v3(89.611,38.151) ; v3(89.611,38.151) cw(c90.136,38.264) 89.756,38.644 ; v3(89.611,38.151) cw(c90.152,38.259) 89.762,38.649 ; v3(89.611,38.151) cw(c90.152,38.259) 89.762,38.649 ; 89.756,38.644 89.762,38.649 ; v4(92.227,38.202) ccw(c92.989,38.863) 92.989,37.854 ; v4(92.227,38.202) cw(c93.305,37.128) 93.302,38.649 ccw(c93.305,37.128) v4(92.227,38.202) ; v11@105.156,73.33 105.14,73.429 105.131,73.483 105.115,73.575 105.131,73.575 v11@105.156,73.575 ; v11@105.156,73.33 v11(105.156,73.431) v11@105.156,73.575 ; v11@105.156,73.575 105.318,73.575 v11@105.318,74.33 ; v11@105.318,74.33 105.75,74.762 ; 105.75,74.762 106.35,75.362 ; 118.165,111.946 ccw(c118.165,112.467) 118.533,112.099 ; 118.165,111.946 ccw(c118.165,112.467) 118.533,112.099 ; 118.165,111.946 ccw(c118.165,112.467) 118.533,112.099 ; 120.766,105.243 120.766,98.74 121.564,97.942 124.384,97.942 ; 86.766,62.924 ccw(c87.682,62.924) 87.035,62.277 cw(c87.682,62.924) 86.766,62.924 ; 127.533,85.1 ccw(c128.217,85.1) 127.734,84.617 cw(c128.217,85.1) 127.533,85.1
  Top Layer w0.9: 89.586,34.671 89.764,34.671 89.84,34.671 90.149,34.671 90.17,34.671 90.373,34.468 90.551,34.29 ; 91.237,32.038 cw(c94.479,32.038) v5@92.187,34.331 ; 91.237,34.214 91.237,31.623 91.237,31.09 93.523,31.09 TY.2@94.364,31.931 ; 93.51,33.286 ccw(c94.264,34.04) TY.2@94.264,32.974 ; 93.807,31.374 ccw(c92.777,32.404) TY.2@94.234,32.404 ; TY.2@94.123,32.674 93.37,33.426 93.37,31.242 93.494,31.118 94.364,31.118 TY.2@94.364,32.032 ; 94.361,33.492 cw(c95.437,33.492) v8@94.737,34.309 ; 94.361,33.567 cw(c95.281,33.567) 94.745,34.315 ccw(c95.28,33.571) 94.364,33.571 ; TY.2@94.364,32.674 94.364,33.658 ; TY.2@94.364,33.419 cw(c95.613,33.419) v8@94.73,34.302 ; v8@94.715,34.284 cw(c95.301,33.887) 95.301,34.595 ; v8@94.749,34.043 ccw(c95.848,32.944) 94.294,32.944 cw(c96.084,32.948) v8(94.818,34.214) ; v8@94.917,34.211 cw(c95.961,33.167) v8@95.961,34.644 ; 95.252,34.519 ccw(c95.252,33.78) v8@94.73,34.302 ; 95.436,34.595 ccw(c95.436,33.596) v8@94.73,34.302 ; v8(95.961,34.519) 95.225,34.519 ; v8@96.046,34.611 ccw(c95.682,34.214) 95.301,34.595 ; 96.749,34.595 95.301,34.595 ; pad.0@116.865,116.23 118.313,116.23 119.05,115.494 ; 118.321,111.946 119.05,112.674 119.05,115.494 ; 118.788,115.756 cw(c117.917,114.884) v1@119.149,114.884 ; v1@119.126,114.804 ccw(c118.658,115.102) 119.05,115.494 ; TY.2@94.289,32.96 cw(c94.759,33.263) 94.364,33.658 ; TY.2@94.289,32.961 cw(c94.752,33.264) 94.361,33.655 ; TY.2@94.289,32.96 cw(c94.759,33.263) 94.364,33.658 ; TY.2@94.289,32.961 cw(c94.809,33.315) 94.364,33.76 ; TY.2@94.289,32.961 cw(c94.802,33.316) 94.361,33.757 ; TY.2@94.289,32.961 cw(c94.809,33.315) 94.364,33.76 ; 94.361,33.655 94.361,33.757 ; 94.361,33.655 94.364,33.658 ; 94.361,33.757 94.364,33.76 ; 94.364,33.658 94.364,33.76 ; 94.364,33.658 v8@94.818,34.112 ; 94.364,33.76 v8(94.818,34.214) ; v8@94.737,34.309 ccw(c95.436,33.496) 94.364,33.496 cw(c95.436,33.496) v8@94.737,34.309 ; v8@94.818,34.112 95.225,34.519 ; v8@94.818,34.112 v8(94.818,34.214) ; v8(94.818,34.214) 95.123,34.519 95.225,34.519 ; 95.225,34.519 ccw(c95.225,33.844) 94.726,34.298 cw(c95.225,33.844) 95.225,34.519 ; 95.225,34.519 cw(c95.695,34.048) 96.023,34.627 ccw(c95.695,34.048) 95.225,34.519 ; 95.225,34.519 95.301,34.595